# EAGLE board TC18-v3 (EAGLE 5.06)
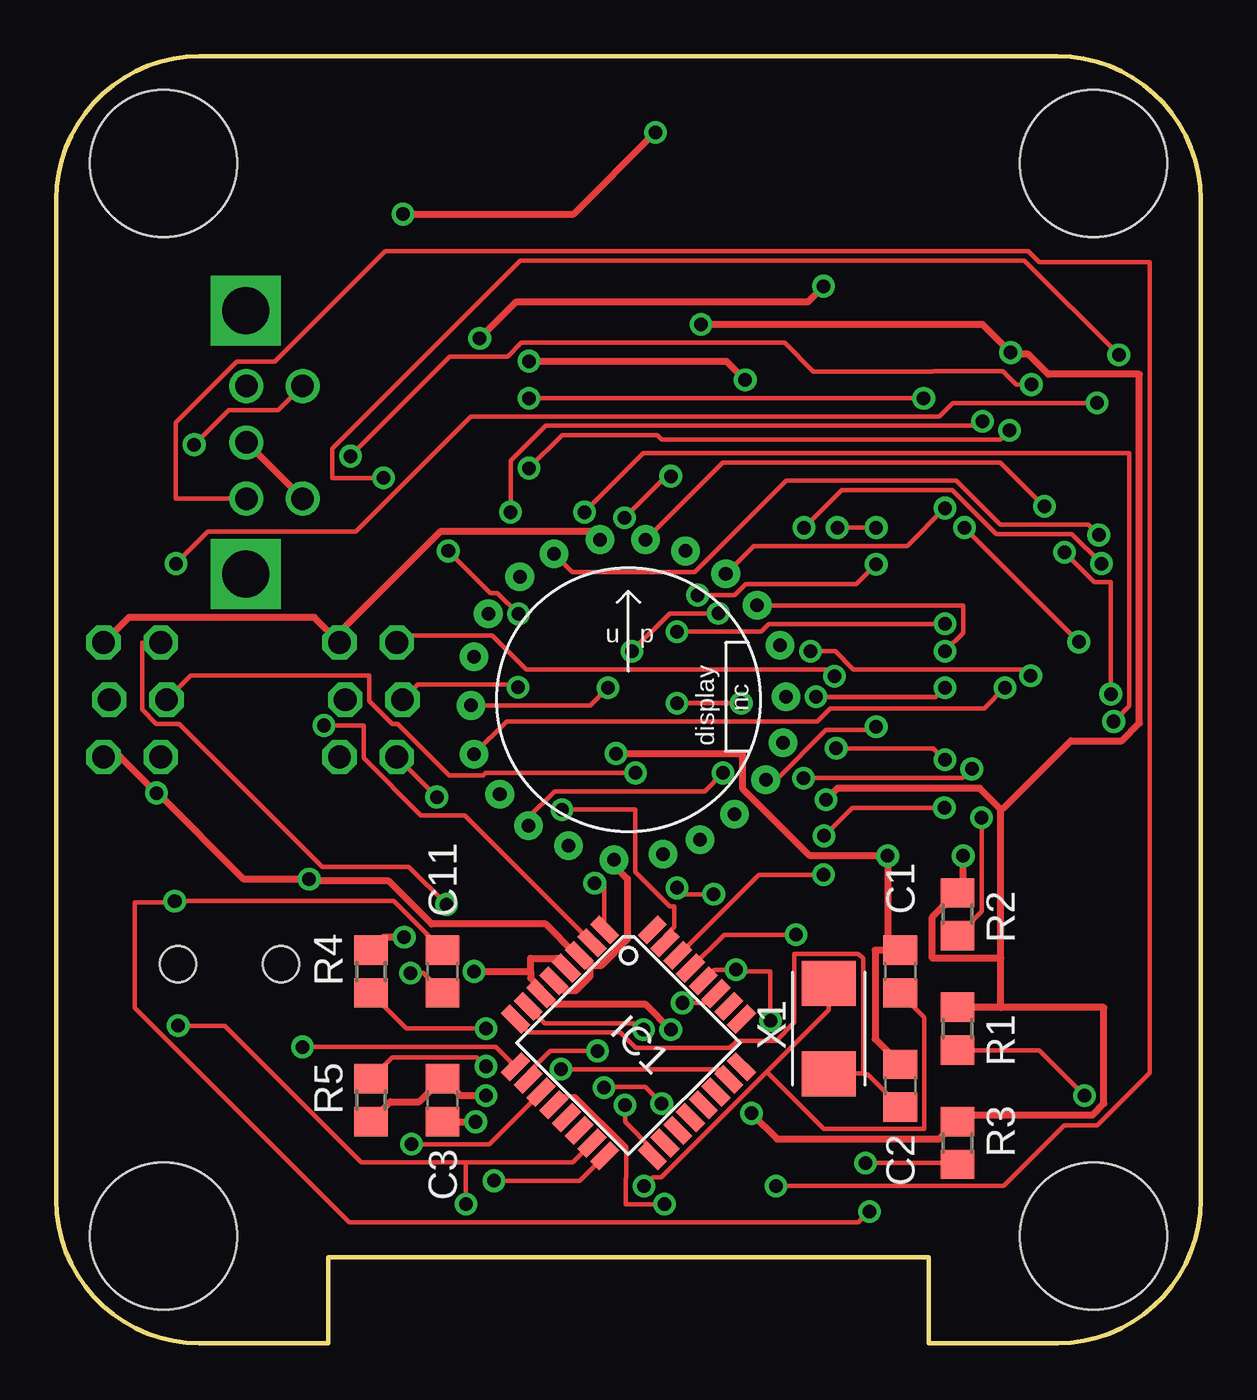
[diagram p0: board, top side]
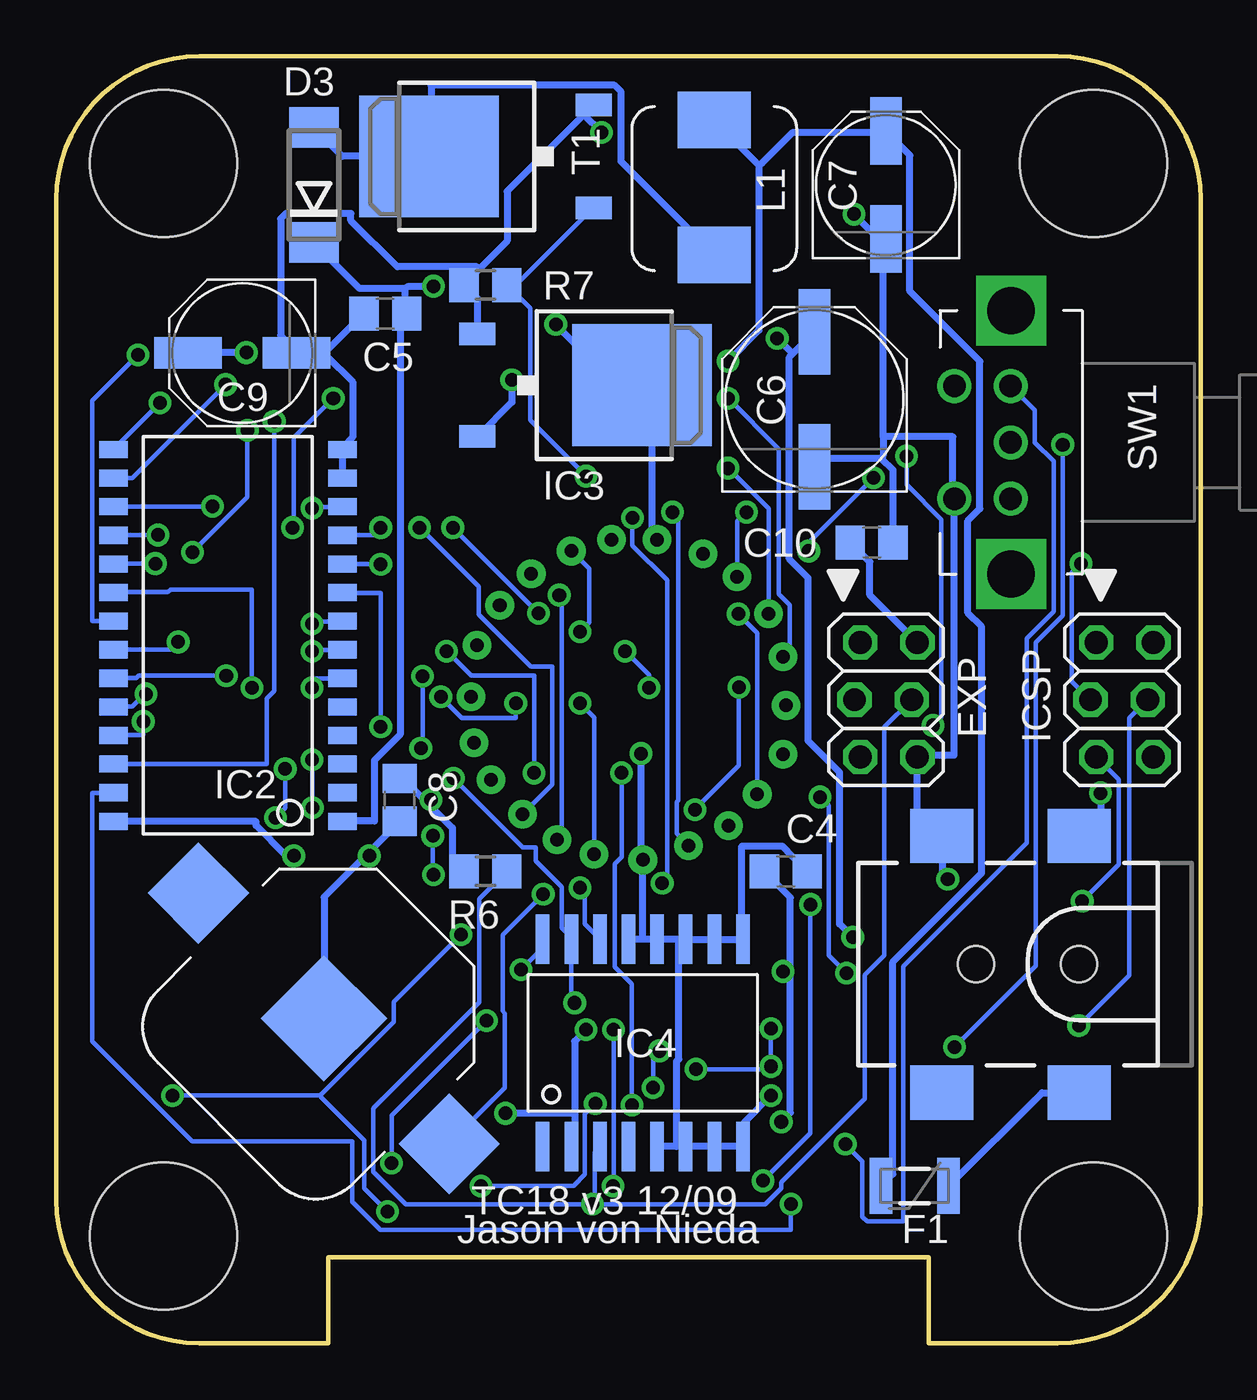
[diagram p1: board, bottom side, seen from below]

Size 50.8 x 57.15 mm. Coordinates in mm from the lower left corner, seen from the top.
Outline: 0,50.8 arc-90 6.35,57.15 44.45,57.15 arc-90 50.8,50.8 50.8,6.35 arc-90 44.45,0 38.73,0 38.73,3.81 12.06,3.81 12.06,0 6.35,0 arc-90 0,6.35 0,50.8
Copper layers (1*16): Top 0.035mm / dielectric 1.5mm / Bottom 0.035mm
Design rules "GoldPhoenix": minimum track width 8mil, minimum drill 0.6mm, track to track 8mil, track to pad 8mil, pad to pad 8mil, via to via 8mil, smd to smd 8mil, copper to edge 40mil, drill to drill 10mil, minimum pad ring 10mil, minimum via ring 8mil, stop-mask expansion 4mil, vias tented up to drill 24mil, thermal gap 10mil
Net classes: 1 Power: width 0.305 mm
Holes 6.53 mm at 4.76,4.76 46.04,4.76 4.76,52.39 46.04,52.39

## Footprints (pad centres in the part's own frame; a part is rotated, then mirrored left to right if it is on the bottom)
BATTCON_12MM = smd 3.962 x 3.962: GND 0,0 | smd 3.175 x 3.175: PWR@1 -7.874,0; PWR@2 7.874,0
C0805 = smd 1.3 x 1.5: 1 -0.95,0; 2 0.95,0
PANASONIC_E = smd 3.8 x 1.4: + 3,0; - -3,0
PANASONIC_D = smd 3 x 1.4: + 2.4,0; - -2.4,0
DO214AA = smd 1.8 x 2.2: A 2.55,0; C -2.55,0
2X03 = drill 1.016 octagon: 1 -2.54,-1.143; 2 -2.54,1.397; 3 0,-1.397; 4 0,1.143; 5 2.54,-1.143; 6 2.54,1.397
PTC-1210L = smd 1 x 2.5: P$1 -1.5,0; P$2 1.5,0
VFD_IV18 = drill 0.6 pad 1.27 round: 1 -0.635,-7.112; 2 1.524,-6.858; 3 3.175,-6.223; 4 4.699,-5.08; 5 6.096,-3.556; 6 6.858,-1.905; 7 6.985,0.127; 8 6.731,2.413; 9 5.715,4.191; 10 4.318,5.588; 11 2.54,6.604; 12 0.762,7.112; 13 -1.27,7.112; 14 -3.302,6.477; 15 -4.826,5.461; 16 -6.223,3.81; 17 -6.858,1.905; 18 -6.985,-0.254; 19 -6.858,-2.413; 20 -5.715,-4.191; 21 -4.445,-5.588; 22 -2.667,-6.477
TQFP32-08 = smd 1.27 x 0.559: 1 -4.293,2.8; 2 -4.293,2; 3 -4.293,1.2; 4 -4.293,0.4; 5 -4.293,-0.4; 6 -4.293,-1.2; 7 -4.293,-2; 8 -4.293,-2.8; 17 4.293,-2.8; 18 4.293,-2; 19 4.293,-1.2; 20 4.293,-0.4; 21 4.293,0.4; 22 4.293,1.2; 23 4.293,2; 24 4.293,2.8 | smd 0.559 x 1.27: 9 -2.8,-4.293; 10 -2,-4.293; 11 -1.2,-4.293; 12 -0.4,-4.293; 13 0.4,-4.293; 14 1.2,-4.293; 15 2,-4.293; 16 2.8,-4.293; 25 2.8,4.293; 26 2,4.293; 27 1.2,4.293; 28 0.4,4.293; 29 -0.4,4.293; 30 -1.2,4.293; 31 -2,4.293; 32 -2.8,4.293
SO-28W = smd 0.762 x 1.27: 1 -8.255,-5.08; 2 -6.985,-5.08; 3 -5.715,-5.08; 4 -4.445,-5.08; 5 -3.175,-5.08; 6 -1.905,-5.08; 7 -0.635,-5.08; 8 0.635,-5.08; 9 1.905,-5.08; 10 3.175,-5.08; 11 4.445,-5.08; 12 5.715,-5.08; 13 6.985,-5.08; 14 8.255,-5.08; 15 8.255,5.08; 16 6.985,5.08; 17 5.715,5.08; 18 4.445,5.08; 19 3.175,5.08; 20 1.905,5.08; 21 0.635,5.08; 22 -0.635,5.08; 23 -1.905,5.08; 24 -3.175,5.08; 25 -4.445,5.08; 26 -5.715,5.08; 27 -6.985,5.08; 28 -8.255,5.08
DPACK = smd 1 x 1.6: 1 -2.28,-4.8; 3 2.28,-4.8 | smd 5.4 x 6.2: 2 0,2.5
SO16W = smd 0.6 x 2.2: 1 -4.445,-4.6; 2 -3.175,-4.6; 3 -1.905,-4.6; 4 -0.635,-4.6; 5 0.635,-4.6; 6 1.905,-4.6; 7 3.175,-4.6; 8 4.445,-4.6; 9 4.445,4.6; 10 3.175,4.6; 11 1.905,4.6; 12 0.635,4.6; 13 -0.635,4.6; 14 -1.905,4.6; 15 -3.175,4.6; 16 -4.445,4.6
POWER_JACK_SMD = smd 2.8 x 2.4: GND 0,-5.7; P$4 6.1,-5.7; VIN0 0,5.7; VIN1 6.1,5.7 | hole 1.6: 0,0; 4.572,0
MURATA_4600 = smd 2.5 x 3.25: P$1 -3.05,0; P$2 2.95,0
R0805 = smd 1.3 x 1.5: 1 -0.95,0; 2 0.95,0
ACZ11BRXE-ROTARY-ENCODER-W-SWITCH = drill 1 round: A -2.5,0.02; B 2.5,0.02; C 0,0.02; S1 -2.5,2.52; S2 2.5,2.52 | drill 2.1 square: P$1 -5.85,0; P$2 5.85,0
TO252 = smd 1 x 1.6: 1 -2.28,-4.8; 2 2.28,-4.8 | smd 5.4 x 6.2: 3 0,2.5
CRYSTAL-SMD-5X3.2-2PIN = smd 2 x 2.4: P$1 -2,0; P$2 2,0

## Placement (x,y rotation side)
BAT1  3v  [BATTCON_12MM]  38.92,14.42 135 bottom
C1  8pF  [C0805]  37.47,16.51 90 top
C2  8pF  [C0805]  37.47,11.43 90 top
C3  100nF  [C0805]  17.14,10.79 90 top
C4  100nF  [C0805]  18.41,20.95 0 bottom
C5  100v/100nF  [C0805]  36.2,45.72 180 bottom
C6  100v/22uF  [PANASONIC_E]  17.14,41.91 90 bottom
C7  47uF/25V  [PANASONIC_D]  13.97,51.44 90 bottom
C8  100nF  [C0805]  35.56,24.13 270 bottom
C9  47uF/25V  [PANASONIC_D]  42.55,43.97 180 bottom
C10  100nF  [C0805]  14.61,35.56 0 bottom
C11  100nF  [C0805]  17.14,16.51 270 top
D3  60v  [DO214AA]  39.37,51.44 90 bottom
EXP  [2X03]  13.97,28.57 270 bottom
F1  PTC  [PTC-1210L]  12.7,6.99 180 bottom
GND  VFD_IV18  [VFD_IV18]  25.4,28.57 0 top
IC1  ATMEGA168-20A  [TQFP32-08]  25.4,13.34 315 top
IC2  MAX6921  [SO-28W]  43.18,31.43 90 bottom
IC3  MC33269D-3.3  [DPACK]  27.3,42.55 270 bottom
IC4  DS3231  [SO16W]  24.77,13.34 0 bottom
ICSP  [2X03]  3.49,28.57 270 bottom
J1  POWER_JACKSMD  [POWER_JACK_SMD]  5.4,16.83 180 bottom
L1  220uH  [MURATA_4600]  21.59,51.28 270 bottom
R1  10k  [R0805]  40.01,13.97 270 top
R2  4.7k  [R0805]  40.01,19.05 90 top
R3  4.7k  [R0805]  40.01,8.89 90 top
R4  100k  [R0805]  13.97,16.51 90 top
R5  1k  [R0805]  13.97,10.79 90 top
R6  4.7k  [R0805]  31.75,20.95 180 bottom
R7  4.7k  [R0805]  31.75,46.99 0 bottom
SW1  [ACZ11BRXE-ROTARY-ENCODER-W-SWITCH]  8.41,40.01 90 bottom
T1  IRLR110-ND  [TO252]  31.75,52.7 90 bottom
X1  16MHz  [CRYSTAL-SMD-5X3.2-2PIN]  34.29,13.97 270 top

## Library data of the parts
BAT1 EXP F1 GND IC2 IC4 ICSP L1 SW1 T1 X1 = JVN
C1-C11 R1-R7 = rcl
D3 = diode
IC1 = avr
IC3 = linear
J1 = SparkFun

## Nets
1: GND.15 IC2.26
2: GND.22 IC2.25
3: GND.16 IC2.24
4: GND.21 IC2.23
5: GND.17 IC2.22
6: GND.20 IC2.21
7: GND.19 IC2.20
8: GND.18 IC2.19
9: GND.14 IC2.18
+9V [Power]: C7.+ F1.P$2 IC3.3 L1.P$1
A: GND.12 IC2.17
B: GND.10 IC2.12
BOOST: IC1.1 R7.2 T1.1
C: GND.4 IC2.11
D: GND.3 IC2.10
DTR-RESET: C11.2 EXP.5
E: GND.5 IC2.9
ENC_A: IC1.10 SW1.A
ENC_B: IC1.11 SW1.B
ENC_SW: IC1.9 SW1.S2
F: GND.11 IC2.8
G: GND.9 IC2.7
GND [Power]: BAT1.GND C1.2 C2.2 C3.2 C4.2 C5.2 C6.- C7.- C8.2 C9.- C10.2 EXP.6 GND.1 IC1.3 IC1.5 IC2.13 IC2.14 IC3.1 IC4.5 IC4.6 IC4.7 IC4.8 IC4.9 IC4.10 IC4.11 IC4.12 IC4.13 ICSP.6 J1.GND J1.P$4 R5.1 R7.1 SW1.C SW1.S1 T1.2
H: GND.2 IC2.6
LOAD: IC1.2 IC2.16
MISO: IC1.16 ICSP.1
MOSI: IC1.15 IC2.27 ICSP.4
N$1 [Power]: D3.A L1.P$2 T1.3
N$2: C1.1 IC1.7 X1.P$1
N$3: C2.1 IC1.8 X1.P$2
N$4: IC1.23 R4.1 R5.2
N$5: BAT1.PWR@1 IC4.14
N$6 [Power]: F1.P$1 J1.VIN0
PPS: EXP.4 IC1.12 IC4.3 R6.1
RESET: C11.1 IC1.29 ICSP.5 R1.2
RXD: EXP.1 IC1.30
SCK: IC1.17 IC2.15 ICSP.3
SCL: IC1.28 IC4.16 R3.1
SDA: IC1.27 IC4.15 R2.1
TXD: EXP.3 IC1.31
VBB [Power]: C5.1 C6.+ D3.C IC2.1 R4.2
VCC [Power]: C3.1 C4.1 C8.1 C9.+ C10.1 EXP.2 GND.13 IC1.4 IC1.6 IC2.28 IC3.2 IC4.2 ICSP.2 R1.1 R2.2 R3.2 R6.2

## Tracks (layer width: path | path; a pad name or v marks a point on that pad's centre or on a via)
1  (via drill 0.6)
  Top 0.203: v41.12,40.95 40.92,40.74 21.72,40.74 20.17,39.19 v20.17,36.91
  Bottom 0.203: v41.12,40.95 41.12,28.96 41.45,28.63 41.45,25.73 IC2.26 | v20.17,36.91 20.57,36.5 GND.15
2  (via drill 0.6)
  Top 0.203: v46.94,27.61 47.62,28.3 47.62,39.52 26.06,39.52 v23.44,36.91
  Bottom 0.203: v46.94,27.61 46.94,27 IC2.25 | v23.44,36.91 23.19,36.65 23.19,24.11 23.27,24.03 23.27,22.63 GND.22
3  (via drill 0.6)
  Top 0.203: v46.81,28.83 46.81,33.81 46.08,33.81 v44.76,35.13 | v42.32,40.54 41.91,40.13 26.87,40.13 26.67,40.34 22.45,40.34 v20.98,38.86
  Bottom 0.203: v46.81,28.83 46.86,28.83 47.42,28.27 IC2.24 | v44.76,35.13 42.32,37.57 v42.32,40.54 | v20.98,38.86 19.18,37.06 GND.16
4  (via drill 0.6)
  Top 0.203: v43.26,29.64 42.98,29.92 35.38,29.92 34.57,30.73 v33.48,30.73 | v29.59,25.32 28.78,24.51 22.12,24.51 20.95,23.34 GND.21
  Bottom 0.203: v43.26,29.64 47.14,29.64 47.24,29.54 IC2.23 | v33.48,30.73 32.38,29.64 29.59,29.64 v29.59,25.32
5  (via drill 0.6)
  Top 0.203: v40.31,36.22 v45.39,31.14 | v20.98,41.96 v38.51,41.96
  Bottom 0.203: v45.39,31.14 45.39,30.81 IC2.22 | v40.31,36.22 40.26,36.27 40.26,40.21 v38.51,41.96 | v20.98,41.96 18.72,39.7 18.72,33.27 18.24,32.79 18.24,30.79 GND.17
6  (via drill 0.6)
  Top 0.203: v47.17,43.89 42.98,48.08 20.6,48.08 12.24,39.73 12.24,38.43 v14.53,38.43 | v17.4,35.18 19.25,33.33 19.58,33.33 v20.52,32.38
  Bottom 0.203: v47.17,43.89 49.2,41.86 49.2,32.08 IC2.21 | v14.53,38.43 17.4,35.56 v17.4,35.18 | v20.52,32.38 19.68,31.55 GND.20
7  (via drill 0.6)
  Top 0.203: v42.11,29.11 41.2,28.19 34.37,28.19 33.78,27.61 19.99,27.61 GND.19
  Bottom 0.203: v42.11,29.11 42.11,33.48 45.72,33.48 45.85,33.35 IC2.20
8  (via drill 0.6)
  Top 0.203: v46.41,34.62 45.09,35.94 41.73,35.94 39.78,37.9 34.87,37.9 v33.2,36.22 | v29.39,32.41 27.23,32.41 v25.55,30.73 | v24.49,29.11 23.7,28.32 GND.18
  Bottom 0.203: v46.41,34.62 IC2.19 | v29.39,32.41 v33.2,36.22 | v25.55,30.73 24.49,29.67 v24.49,29.11
9  (via drill 0.6)
  Top 0.203: v46.28,35.89 45.82,36.35 41.91,36.35 39.95,38.3 32.41,38.3 28.35,34.24 22.91,34.24 GND.14
  Bottom 0.203: v46.28,35.89 IC2.18
+9V  (via drill 0.6)
  Top 0.305: v30.58,42.77 29.74,43.61 v20.98,43.61
  Bottom 0.305: v30.58,42.77 30.58,41.78 32.08,40.28 IC3.3 | v20.98,43.61 19.61,44.98 19.61,52.32 | 19.61,52.32 21.59,54.3 L1.P$1 | F1.P$2 13.66,7.52 13.66,16.94 9.73,20.88 9.73,31.83 10.34,32.44 10.34,36.52 9.8,37.06 9.8,43.61 12.9,46.71 12.9,52.76 13.97,53.82 C7.+ 14.1,53.75 18.14,53.75 19.48,52.4 19.61,52.32
A  (via drill 0.6)
  Top 0.203: v43.87,37.16 41.91,39.12 29.59,39.12 GND.12
  Bottom 0.203: v43.87,37.16 IC2.17
B  (via drill 0.6)
  Top 0.203: v39.45,37.08 37.77,35.41 30.96,35.41 GND.10
  Bottom 0.203: v39.45,37.08 39.45,37.13 38.1,37.13 IC2.12
BOOST  (via drill 0.6)
  Top 0.203: v23.9,20.42 24.33,20.42 24.33,18.36 IC1.1 | v25.22,36.65 27.08,38.51 v27.28,38.51
  Bottom 0.203: v23.9,20.42 23.67,20.65 23.67,33.88 25.22,35.43 v25.22,36.65 | v27.28,38.51 29.77,41 29.77,45.97 30.79,46.99 R7.2 30.53,46.86 26.98,50.42 T1.1
C  (via drill 0.6)
  Top 0.203: v34.67,36.22 v36.4,36.22
  Bottom 0.203: v36.4,36.22 36.4,35.89 IC2.11 | v34.67,36.22 32.05,33.6 32.05,32.36 29.74,30.05 28.78,30.05 28.78,24.82 GND.4
D  (via drill 0.6)
  Top 0.203: v36.4,34.59 35.51,33.71 30.61,33.71 30.12,33.22 v28.47,33.22
  Bottom 0.203: v36.4,34.59 38.1,34.59 IC2.10 | v28.47,33.22 28.37,33.12 28.37,22.55 GND.3
DTR-RESET  (via drill 0.6)
  Top 0.203: v15.72,16.43 16.28,16.43 C11.2 | v16.89,24.26 EXP.5
  Bottom 0.203: v15.72,16.43 16.51,17.22 16.51,23.88 v16.89,24.26
E  (via drill 0.6)
  Top 0.203: v36.4,27.38 36.25,27.23 34.16,27.23 31.95,25.02 GND.5
  Bottom 0.203: v36.4,27.38 36.4,33.33 38.1,33.33 IC2.9
ENC_A  (via drill 0.6)
  Top 0.203: v24.03,12.98 21.92,12.98 20.95,12.01 20.95,11.73 IC1.10 | v24.31,11.35 24.33,11.38 26.14,11.38 v26.87,10.64 | v31.95,6.99 42.06,6.99 44.76,9.68 46.2,9.68 48.54,12.01 48.54,48.01 43.64,48.01 43.16,48.49 14.61,48.49 9.7,43.59 8,43.59 5.31,40.89 5.31,37.52 SW1.A
  Bottom 0.203: v24.03,12.98 24.31,12.7 v24.31,11.35 | v26.87,10.64 27.33,10.19 27.33,7.49 27.84,6.99 v31.95,6.99
ENC_B  (via drill 0.6)
  Top 0.203: v15.77,8.84 19.23,8.84 21.51,11.12 IC1.11
  Bottom 0.203: v15.77,8.84 15.01,8.08 15.01,5.61 14.81,5.41 13.21,5.41 13.21,16.74 7.72,22.23 7.72,31.29 6.53,32.49 6.53,39.17 7.37,40.01 7.37,41.43 8.43,42.49 SW1.B
ENC_SW  (via drill 0.6)
  Top 0.203: v10.92,13.16 19.51,13.16 20.37,12.29 IC1.9 | v6.12,39.9 7.64,41.43 9.86,41.43 10.92,42.49 SW1.S2
  Bottom 0.203: v10.92,13.16 7.32,16.76 7.32,31.11 6.12,32.31 v6.12,39.9
F  (via drill 0.6)
  Top 0.203: v39.45,31.95 39.42,31.93 31.62,31.93 31.29,31.6 v27.56,31.6
  Bottom 0.203: v39.45,31.95 39.45,32.05 38.1,32.05 IC2.8 | v27.56,31.6 27.15,32 27.15,34.39 GND.11
G  (via drill 0.6)
  Top 0.203: v39.45,30.73 40.26,31.55 40.26,32.77 GND.9
  Bottom 0.203: v39.45,30.73 39.45,30.79 38.1,30.79 IC2.7
GND  (via drill 0.6)
  Top 0.305: C2.2 37.47,12.39 36.35,13.51 36.35,17.45 C1.2 36.91,17.58 v36.91,21.64 36.78,21.67 33.43,21.67 30.45,24.64 30.45,26.19 v24.84,26.19 | R5.1 14.83,10.72 16.1,10.72 17.12,11.73 C3.2 17.27,11.66 17.93,11 v19.07,11 | 23.67,16.76 23.67,16.99 23.42,16.99 23.22,17.2 IC1.3 23.06,17.27 21.72,18.62 16.66,18.62 14.76,20.52 11.35,20.52 v11.23,20.6 8.33,20.6 4.57,24.36 v4.45,24.43 2.85,26.04 ICSP.6 | 23.67,16.76 23.67,16.26 23.06,15.65 22.53,15.65 22.1,16.08 IC1.5 | GND.1 24.77,21.21 25.35,20.62 25.35,17.93 24.18,16.76 23.67,16.76 | SW1.C 8.46,40.01 10.95,37.52 SW1.S1 | v26.59,53.77 22.96,50.14 v15.39,50.14
  Bottom 0.305: 36.99,21.73 38.91,19.81 BAT1.GND | 36.99,21.73 35.56,23.16 C8.2 | v36.91,21.64 36.99,21.73 | 23.27,8.74 22.99,8.74 IC4.6 21.72,8.74 IC4.7 IC4.8 20.24,8.87 20.24,9.83 v19.07,11 | 23.27,8.74 IC4.5 | C4.2 17.48,20.95 18.34,21.82 18.34,21.84 18.57,22.07 20.37,22.07 20.37,18.01 20.32,17.96 IC4.9 20.5,17.93 IC4.10 21.72,17.93 IC4.11 22.99,17.93 23.16,17.93 | 23.16,17.93 IC4.12 24.26,17.93 24.77,17.93 | 24.77,17.93 IC4.13 | 24.77,17.93 GND.1 24.84,21.59 v24.84,26.19 | 23.27,8.74 23.27,12.52 23.16,12.62 23.16,17.93 | IC2.13 IC2.14 38.05,39.83 37.64,40.23 37.64,42.7 38.81,43.87 C9.- | C5.2 38.89,43.99 40.13,43.99 C9.- | IC3.1 32.11,46.41 R7.1 32.61,47.12 32.03,47.7 | 27.38,54.56 30.79,51.16 30.79,48.95 32.03,47.7 | 27.38,54.56 26.98,54.97 T1.2 | C9.- 40.21,44.12 40.84,44.76 40.84,49.94 40.62,50.16 37.72,50.16 37.72,49.86 35.66,47.8 32.13,47.8 32.03,47.7 | 14.17,39.29 13.66,38.79 C10.2 | 14.17,39.29 17.14,39.29 C6.- | 14.1,40.26 14.1,39.42 14.17,39.29 | 14.1,40.26 14.1,48.9 13.97,49.02 C7.- 14.22,48.97 v15.39,50.14 | v4.45,24.43 4.45,23.47 5.38,22.53 J1.GND | v11.23,20.6 11.46,20.83 11.46,22.38 J1.P$4 12.57,23.6 EXP.6 12.45,26.11 10.95,26.11 10.95,37.49 SW1.S1 11,37.64 11,40.26 14.1,40.26 | v26.59,53.77 27.38,54.56
H  (via drill 0.6)
  Top 0.203: v39.45,29.11 39.04,28.7 v33.73,28.7 | v27.56,28.42 v30.4,28.42
  Bottom 0.203: v39.45,29.11 39.45,29.52 38.1,29.52 IC2.6 | v33.73,28.7 32.79,27.76 30.4,27.76 v30.4,28.42 | v27.56,28.42 26.92,27.79 GND.2
LOAD  (via drill 0.6)
  Top 0.203: v11.89,27.43 13.64,27.43 13.64,25.98 16.18,23.44 18.14,23.44 23.77,17.8 IC1.2 | v13.06,39.4 17.48,43.81 20.04,43.81 20.65,44.42 32.33,44.42 33.6,43.16 38.91,43.16 38.94,43.18 42.01,43.18 42.62,42.57 v43.28,42.57
  Bottom 0.203: v11.89,27.43 11.51,27.81 11.51,36.58 13.06,38.12 v13.06,39.4 | v43.28,42.57 47.42,38.43 IC2.16
MISO  (via drill 0.6)
  Top 0.203: v19.43,7.21 23.24,7.21 24.33,8.31 IC1.16 | v17.32,19.48 15.65,21.16 11.81,21.16 5.46,27.51 4.45,27.51 3.81,28.14 3.81,31.11 ICSP.1
  Bottom 0.203: v19.43,7.21 17.32,9.32 v17.32,19.48
MOSI  (via drill 0.6)
  Top 0.203: 18.19,8.03 13.54,8.03 7.47,14.1 v5.41,14.1 | 18.19,8.03 22.94,8.03 23.77,8.87 IC1.15 | 18.19,8.03 v18.19,6.17
  Bottom 0.203: v5.41,14.1 3.17,16.33 3.17,27.76 2.36,28.57 ICSP.4 | v18.19,6.17 18.19,5.03 36.42,5.03 37.67,6.27 37.67,8.97 44.76,8.97 49.2,13.41 49.2,24.43 48.26,24.43 IC2.27
N$1
  Bottom 0.305: D3.A 38.1,52.7 T1.3 34.16,52.83 34.16,55.85 26.01,55.85 25.73,55.58 25.73,52.48 L1.P$2
N$2  (via drill 0.6)
  Top 0.203: v26.06,13.92 25.78,14.2 21.69,14.2 20.95,14.94 IC1.7 | v26.09,6.99 26.47,7.37 26.85,7.37 31.53,12.05 | 31.53,12.05 34.29,14.81 X1.P$1 | C1.1 37.47,15.54 38.53,14.48 38.53,9.53 34.06,9.53 31.53,12.05
  Bottom 0.203: v26.06,13.92 26.06,7.01 v26.09,6.99
N$3
  Top 0.203: 35.81,11.99 35.81,17.09 35.61,17.3 32.77,17.3 32.77,14.25 31.95,13.44 30.23,13.44 29.9,13.11 25.73,13.11 25.04,13.79 20.98,13.79 20.4,14.38 IC1.8 | 35.81,11.99 34.29,11.99 X1.P$2 | C2.1 36.02,11.94 35.89,11.94 35.81,11.99
N$4  (via drill 0.6)
  Top 0.203: v22.4,12.17 29.41,12.17 29.84,11.73 IC1.23 | v19.07,12.29 18.67,12.7 14.91,12.7 13.97,11.76 R5.2 | v19.07,13.97 15.54,13.97 13.97,15.54 R4.1
  Bottom 0.203: v22.4,12.17 19.07,12.17 v19.07,12.29 v19.07,13.97
N$5  (via drill 0.6)
  Top 0.203: v27.56,20.22 27.84,19.94 v29.18,19.94
  Bottom 0.203: v27.56,20.22 27.33,19.99 27.33,18.62 26.67,17.96 IC4.14 | v29.18,19.94 30.99,18.14 30.99,14.76 30.89,14.66 30.89,11.33 33.35,8.87 BAT1.PWR@1
N$6
  Bottom 0.305: F1.P$1 11.18,6.99 7.04,11.12 J1.VIN0
PPS  (via drill 0.6)
  Top 0.203: v27,6.17 25.27,6.17 25.27,7.32 25.3,7.34 25.3,8.71 23.04,10.97 22.48,10.97 22.1,10.59 IC1.12
  Bottom 0.203: v27,6.17 26.9,6.27 26.9,8.48 26.67,8.71 IC4.3 | R6.1 32.03,19.74 32.03,15.14 36.73,10.44 36.73,7.62 35.28,6.17 v27,6.17 | EXP.4 14.05,27.36 14.05,17.22 14.91,16.36 14.91,10.85 18.62,7.14 18.62,6.88 19.33,6.17 26.82,6.17 26.82,6.22 v27,6.17
RESET  (via drill 0.6)
  Top 0.203: v32.84,18.14 29.64,18.14 28.17,16.66 IC1.29 | v45.64,11 43.64,13.01 40.01,13.01 R1.2 | C11.1 17.14,17.48 14.99,19.63 v5.26,19.63 5.18,19.58 3.48,19.58 3.48,14.88 13.01,5.36 35.61,5.36 v36.09,5.84
  Bottom 0.203: v32.84,18.14 35.81,15.16 35.81,14.28 39.09,11 | 39.09,11 v45.64,11 | v5.26,19.63 3.63,21.26 3.63,25.04 4.62,26.04 ICSP.5 | v36.09,5.84 37.13,6.88 37.13,9.02 39.04,10.92 39.09,11
RXD  (via drill 0.6)
  Top 0.203: v34.06,20.8 31.19,20.8 27.61,17.22 IC1.30 | v34.09,22.53 35.33,23.77 v39.42,23.77 | v39.45,25.91 38.94,26.42 v34.62,26.42 | v34.54,29.62 34.24,29.92 20.85,29.92 19.36,31.42 15.42,31.42 EXP.1
  Bottom 0.203: v34.06,20.8 34.09,20.83 v34.09,22.53 | v39.42,23.77 39.45,23.8 v39.45,25.91 | v34.62,26.42 34.54,26.49 v34.54,29.62
SCK  (via drill 0.6)
  Top 0.203: v25.25,10.57 25.25,9.83 26.44,8.64 26.44,8.33 IC1.17 | v25.7,25.32 19.05,25.32 18.95,25.22 17.45,25.22 15.16,27.51 14.91,27.51 13.89,28.52 13.89,29.64 5.97,29.64 4.9,28.57 ICSP.3 | v46.2,41.76 39.8,41.76 39.19,41.15 18.39,41.15 13.28,36.04 6.73,36.04 v5.31,34.62
  Bottom 0.203: v25.25,10.57 25.25,15.95 26.01,16.71 26.01,21.29 25.7,21.59 v25.7,25.32 | v46.2,41.76 IC2.15 | v5.31,34.62 5.71,34.21 5.71,29.39 4.9,28.57 ICSP.3
SCL  (via drill 0.6)
  Top 0.203: IC1.28 28.73,16.1 29.21,16.59 v30.18,16.59 30.23,16.51 31.7,16.51 v31.7,14.33 | v35.92,8 39.95,8 R3.1
  Bottom 0.203: v30.18,16.59 29.21,17.55 IC4.16 | v35.92,8 35.92,10.11 v31.7,14.33
SDA  (via drill 0.6)
  Top 0.203: v27.79,15.11 28.85,15.11 29.26,15.52 IC1.27 | v41.07,23.34 41.07,19.18 R2.1 | v40.64,25.5 40.23,25.09 v33.17,25.09
  Bottom 0.203: v27.79,15.11 27.94,15.27 IC4.15 27.96,18.03 28.37,18.44 28.37,20.27 29.52,21.41 29.52,22.02 30.1,22.02 v33.17,25.09 | v41.07,23.34 40.64,23.77 v40.64,25.5
TXD  (via drill 0.6)
  Top 0.203: v22.45,23.7 25.7,23.7 25.7,20.93 27.23,19.41 27.43,19.41 27.43,18.49 27.03,18.09 27.03,17.8 IC1.31 | v20.5,29.13 20.37,29.26 16.05,29.26 EXP.3
  Bottom 0.203: v22.45,23.7 20.5,25.65 v20.5,29.13
VBB  (via drill 0.6)
  Top 0.305: v15.44,18.03 14.53,18.03 13.97,17.48 R4.2 | v34.06,46.94 33.38,46.25 20.42,46.25 v18.8,44.63
  Bottom 0.305: IC2.1 36.68,23.19 36.68,25.88 35.53,27.03 35.53,45.44 35.26,45.72 C5.1 35.33,45.85 35.33,46.84 | 35.33,46.84 37.34,46.84 39.37,48.87 D3.C | v15.44,18.03 16.03,18.62 16.03,25.35 17.42,26.75 17.42,33.98 18.26,34.82 18.26,43.79 18.11,43.94 | 18.11,43.94 C6.+ | v34.06,46.94 34.06,46.91 35.2,46.91 35.33,46.84 | 18.11,43.94 v18.8,44.63
VCC  (via drill 0.6)
  Top 0.305: 21.06,16.51 21.06,17.09 22.2,17.09 22.63,16.66 IC1.4 | 21.06,16.51 21.06,16.2 21.51,15.75 21.51,15.54 IC1.6 21.67,15.47 22.07,15.06 26.14,15.06 v27.28,13.92 | v18.62,9.83 17.14,9.83 C3.1 | v18.54,16.51 21.06,16.51 | v40.26,21.64 40.26,20.02 40.01,20.02 R2.2 39.88,19.91 38.89,18.92 38.89,17.09 41.94,17.09 | 41.94,14.91 R1.1 | 41.94,14.91 46.51,14.91 46.51,10.64 46,10.13 40.28,10.13 40.01,9.86 R3.2 39.88,9.75 39.19,9.07 32,9.07 v30.86,10.21 | v34.16,24.13 34.67,24.64 41,24.64 41.94,23.7 | 41.94,17.09 41.94,23.7 | 41.94,14.91 41.94,17.09 | ICSP.2 3.23,32.23 11.46,32.23 EXP.2 12.45,31.45 17.04,36.04 23.77,36.04 GND.13 | v28.63,45.24 41.12,45.24 v42.37,43.99 42.49,43.92 43.16,43.92 44.04,43.03 48.08,43.03 48.08,27.53 47.3,26.75 45.03,26.75 42.06,23.77 41.94,23.7
  Bottom 0.305: v18.62,9.83 18.21,10.24 18.21,16.51 | 18.21,16.51 18.21,19.79 19.36,20.93 C4.1 | 18.21,16.51 v18.54,16.51 | 27.79,10.21 27.79,13.41 v27.28,13.92 | 27.79,10.21 27.79,8.89 IC4.2 | v40.26,21.64 40.59,21.64 41.94,22.99 41.94,23.16 48.26,23.16 IC2.28 | 34.31,23.98 35.41,25.07 C8.1 | 34.31,23.98 33.22,22.89 33.22,21.46 32.72,20.95 R6.2 | v34.16,24.13 34.31,23.98 | 27.79,10.21 v30.86,10.21 | EXP.2 14.68,33.22 14.68,34.7 C10.1 | GND.13 24.36,35.92 24.36,42.11 IC3.2 24.94,42.62 26.01,42.62 v28.63,45.24 | v42.37,43.99 44.93,43.99 C9.+

## Text on the board
bPlace: TC18 v3 12/09 | Jason von Nieda